# Altium PCB PCB.PcbDoc
Units mm, origin at the board's own origin, x right, y up, seen from the top; angles counter-clockwise.
Board outline 60.07 x 27.18 mm, 2 copper layers (Top Layer, Bottom Layer); 26 components, 17 nets, 70 pads, 2 vias.
Unrouted connection lines stored in the file: 1.
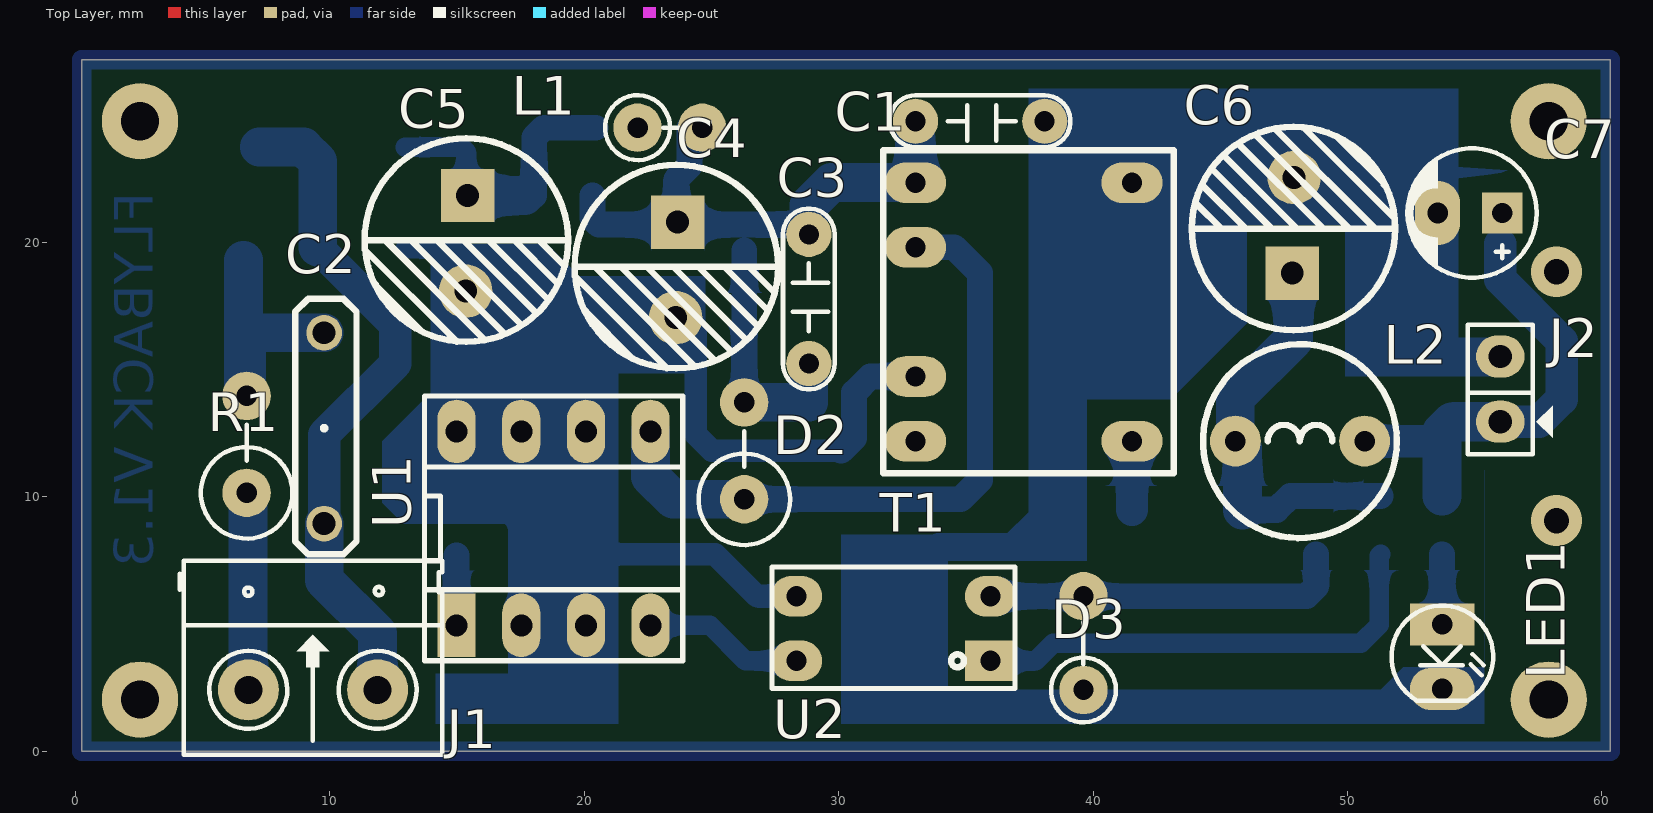
[diagram p0: Top Layer view]
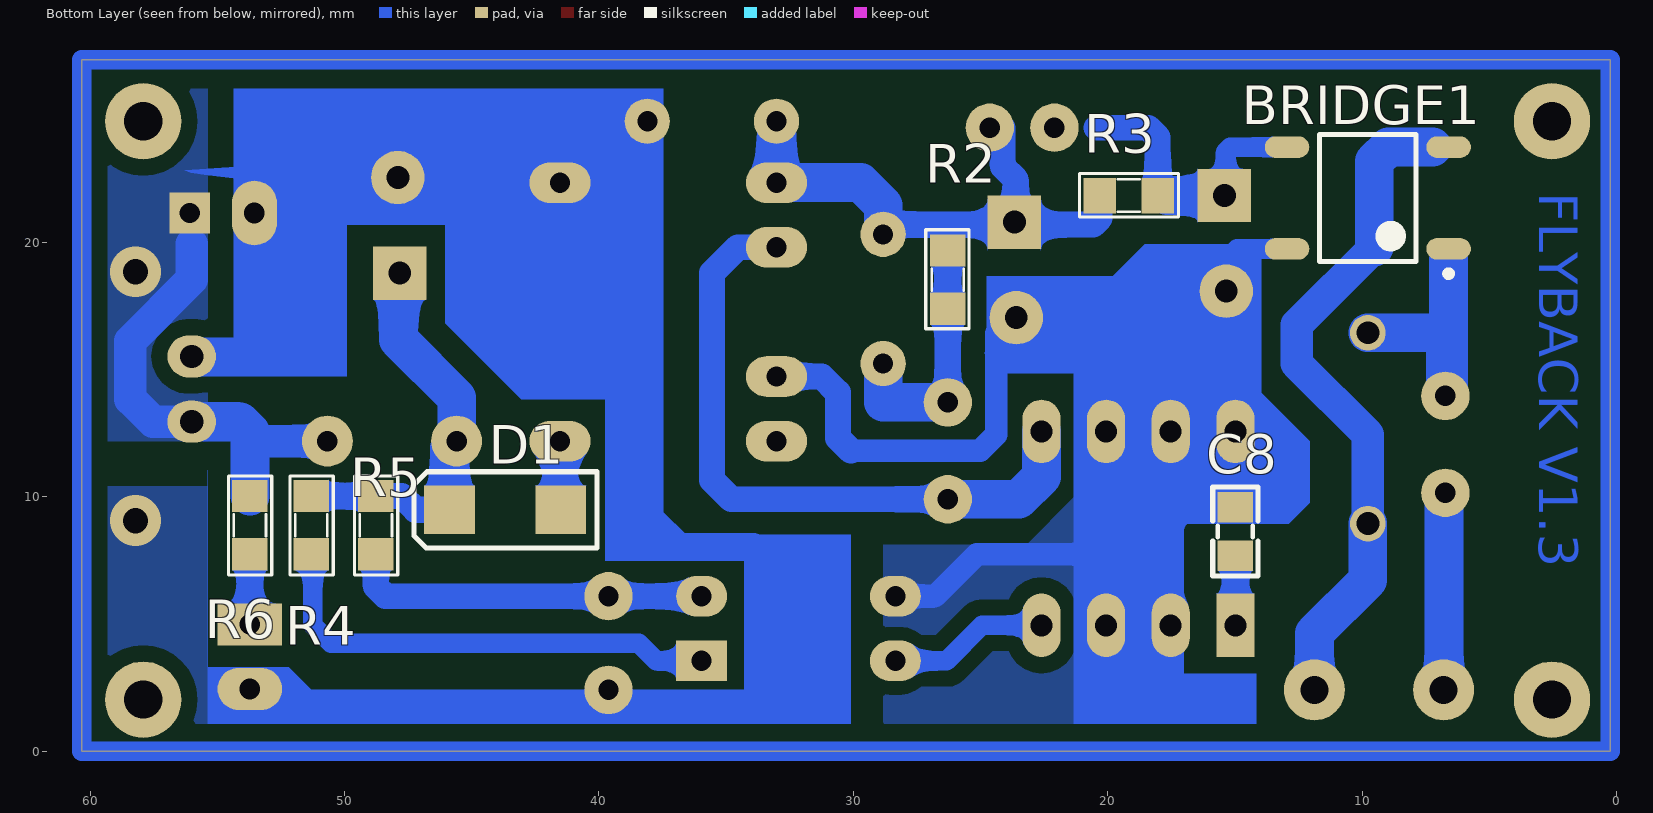
[diagram p1: Bottom Layer view, seen from below]
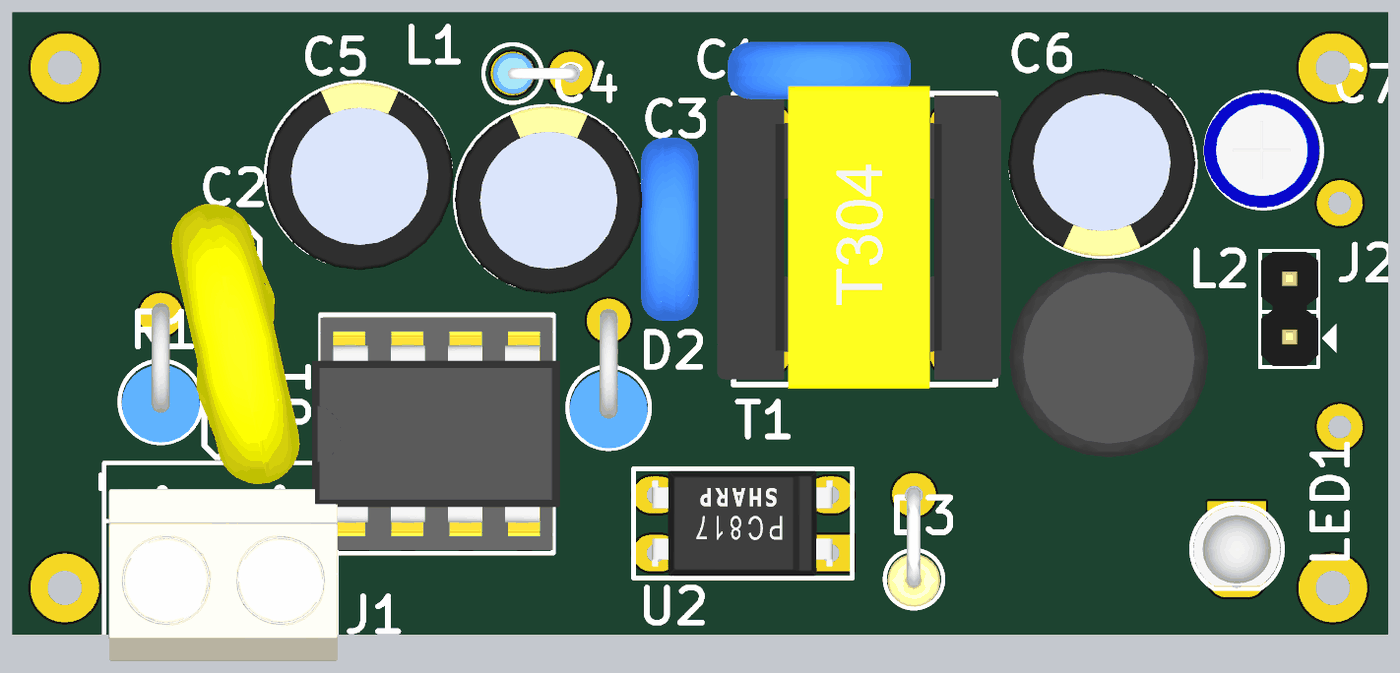
[diagram p2: 3D render of the assembled board from above, using the file's embedded part models]
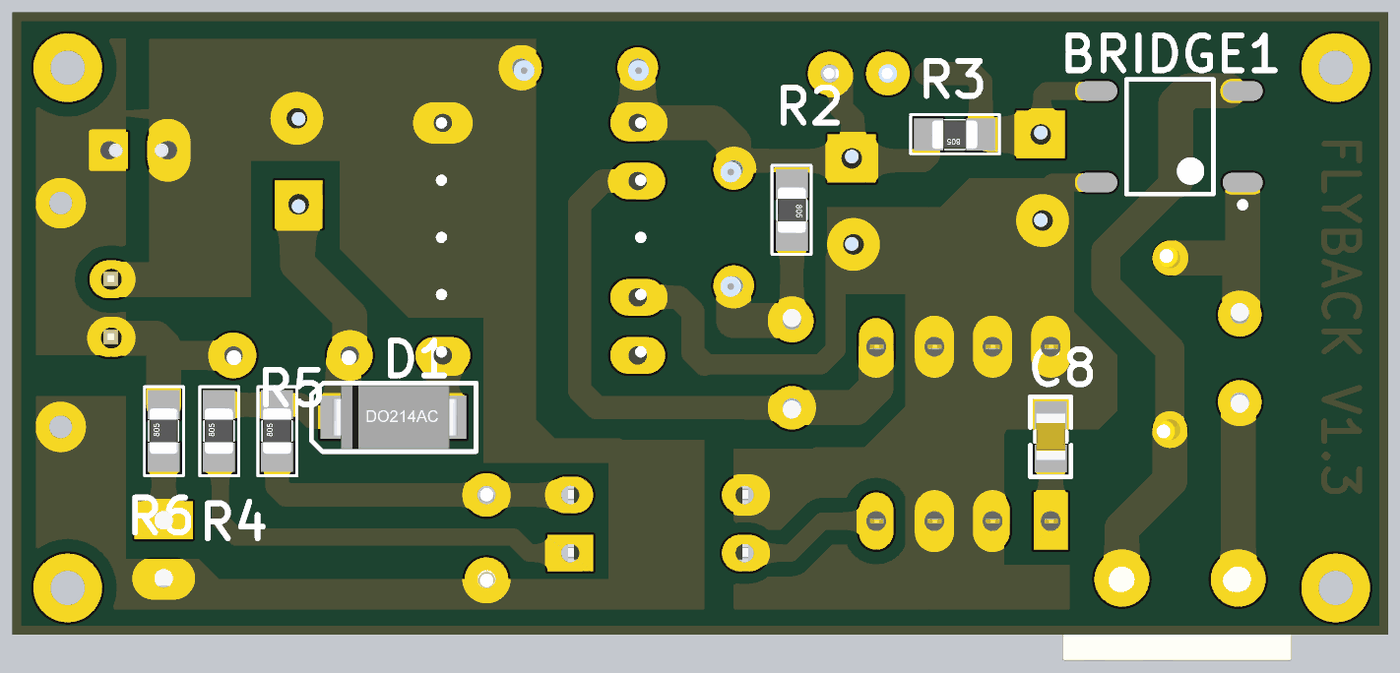
[diagram p3: 3D render of the assembled board from below, using the file's embedded part models]

## Layer stack, top to bottom
Top Solder: solder mask 0.0102, Solder Resist, Dk 3.5
Top Layer: signal copper 0.0356
Dielectric 1: dielectric 0.32, FR-4, Dk 4.8
Bottom Layer: signal copper 0.0356
Bottom Solder: solder mask 0.0102, Solder Resist, Dk 3.5

## Board outline
0.254,0 60.325,0 60.325,27.178 0.254,27.178

## Design rules (kind name [scope] priority, off if disabled: settings)
Clearance [All] p1: gap=0.508 ignorepadtopadclearanceinfootprint=FALSE except(0.635: Arc-Fill Arc-Poly Arc-Region Track-Fill Track-Poly Track-Region SMDPad-Fill SMDPad-Poly SMDPad-Region THPad-Fill THPad-Poly THPad-Region Via-Fill Via-Poly Via-Region Fill-Fill Fill-Poly Fill-Region Poly-Poly Poly-Region Region-Region)
PlaneConnect [All] p1: planeconnectstyle=Direct reliefexpansion=0.508 reliefentries=4 reliefconductorwidth=0.254 reliefairgap=0.254
PolygonConnect [All] p1: connectstyle=Direct reliefconductorwidth=0.254 reliefentries=4 polygonreliefangle="90 Angle" airgapwidth=0.254
RoutingVias [All] p1: holewidth=0.711 width=1.27 viastyle="Through Hole" minholewidth=0.711 minwidth=1.27 maxholewidth=0.711 maxwidth=1.27
SolderMaskExpansion [All] p1: expansion=0.102
Width [All] p1: maxlimit=1.524 minlimit=0.508 preferedwidth=1.016
29 further rules are at their usual default settings.

## Components (designator, comment, footprint, x,y, rotation, side; value= is the part's Value field where it differs from the comment)
BRIDGE1 "MB10S" DBS10 9.779,21.749 r0 bottom
C1 "1n 400V" CN2 38.1,24.765 r180 top
C2 "471K" MOV-14D(5.2MM-T) 9.779,12.7 r90 top
C3 "1n 400V" CN2 28.829,20.32 r270 top
C4 "4.7uF" "tu hoa 8mm" 23.622,19.05 r270 top
C5 "4.7uF" "tu hoa 8mm" 15.367,20.094 r270 top
C6 "470uF" "tu hoa 8mm" 47.879,20.546 r90 top
C7 "100uF" "TU HOA 100uF 16V" 56.083,21.158 r180 top value=100uF/35V/50V
C8 "104" "Tu 0805" 14.986,8.636 r90 bottom
D1 "SS14" "DIODE SMD" 43.688,9.59 r180 bottom
D2 "FR107" RES-1WD 26.289,11.557 r90 top value=1N4007
D3 "3.9V" RES-1/4WD 39.624,4.064 r90 top
J1 "AC" HED2 6.798,2.413 r0 top
J2 "DC" JP2 56.007,12.954 r90 top
L1 "150mH" R1/4W1 22.098,24.511 r0 top value="150 mH"
L2 "10uH 2A" "CUON CAM 100uH3A" 48.133,12.192 r0 top
LED1 "LED" LED-3 53.721,4.991 r270 top value="LED 3 ly Single Colour"
R1 "10R" RES-1WD 6.731,11.811 r90 top
R2 "100k" SM-RES-0805 26.289,19.685 r270 bottom
R3 "1k" SM-RES-0805 18.034,21.844 r0 bottom value="R1/4W - 1K"
R4 "47" SM-RES-0805 51.308,7.747 r90 bottom
R5 "470R" SM-RES-0805 48.768,7.747 r90 bottom value=470
R6 "1k" SM-RES-0805 53.721,7.747 r90 bottom
T1 "EE12.7" EE13 31.75,10.922 r0 top
U1 "TNY264" DIP8 18.745,8.763 r90 top
U2 "PC817" OPTO 35.941,3.556 r180 top value=TLP5211

## Footprints (in the part's own frame and the unit in brackets; to place one, negate y for a bottom-side part, rotate by r counter-clockwise, add the part's x,y. Pads: shape width x height; smd on the part's side, far side on the other; paste and mask are expansions set on the pad)
CN2 [mil]
  round 70 hole 31: 1(0,0) 2(200,0)
  silkscreen extent -40,-40 240,40, body extent -54,-44 260,55, height 407
"CUON CAM 100uH3A" [mm] "100uH3A"
  round 2 hole 0.8: 1(-2.54,0) 2(2.54,0)
  silkscreen extent -3.81,-3.81 3.81,3.81, body extent -4.35,-4.45 4.35,4.25, height 10.01
DBS10 [mm] "SOP, 4-Leads, Body 5.01x4.50mm, Pitch 4.00mm, IPC Medium Density"
  oval 1.75x0.85 smd: 1(-3.175,2) 2(-3.175,-2) 3(3.175,-2) 4(3.175,2)
  silkscreen extent -3.3,-2.5 1.9,3.1, body extent -2.3,-2.5 2.3,2.5, height 2.65
"DIODE SMD" [mm]
  rect 2x1.9 smd: 1(2.184,-0.102) 2(-2.184,-0.102)
  silkscreen extent -3.58,-1.6 3.61,1.4, body extent -2.67,-1.5 2.82,1.3, height 2.3
DIP8 [mm]
  rect 2.5x1.5 hole 0.864: 1(-3.81,3.759)
  oval 2.5x1.5 hole 0.864: 2(-3.81,1.219) 3(-3.81,-1.321) 4(-3.81,-3.861) 5(3.81,-3.861) 6(3.81,-1.321) 7(3.81,1.219) 8(3.81,3.759)
  silkscreen extent -5.21,-5.13 5.21,5.03, body extent -5.08,-5.4 5.08,5.4, height 8.1
EE13 [mm] "EE13"
  oval 2.4x1.6 hole 0.8: 1(1.27,11.43) 2(1.27,8.89) 4(1.27,3.81) 5(1.27,1.27) 6(9.779,1.27) 10(9.779,11.43)
  silkscreen extent 0,0 11.43,12.7, body extent -0.71,-0.18 11.69,13.04, height 11.88
HED2 [mm] "Header 2, 2 pin, hight 300mil, Pin to Pin 200, Colour Green"
  round 2.4 hole 1.1: 1(0,0) 2(5.08,0)
  silkscreen extent -2.69,-2.54 7.62,5.08, body extent -2.33,-3.56 7.67,3.94, height 10
JP2 [mil]
  oval 65x75 hole 36: 1(0,0) 2(101,0)
  silkscreen extent -50,-81 150,50, body extent -48,-50 148,48, height 323
LED-3 [mil] "LED 2 PIN, 3ly Only colour"
  rect 65x100 hole 32: 1(0,0)
  oval 65x100 hole 32: 2(100,0)
  silkscreen extent -29,-78 118,79, body extent -25,-75 113,75, height 217
MOV-14D(5.2MM-T) [mm]
  round 1.4 hole 0.9: 1(-3.75,0) 2(3.75,0)
  silkscreen extent -4.95,-1.27 5.08,1.14, body extent -6.56,-3.68 6.57,3.24, height 15.25
OPTO [mm]
  rect 2x1.6 hole 0.8: 1(-0.025,0)
  oval 2x1.6 hole 0.8: 2(-0.025,-2.54) 3(7.595,-2.54) 4(7.595,0)
  silkscreen extent -0.99,-3.68 8.56,1.09, body extent -0.13,-3.59 7.75,1, height 4.81
R1/4W1 [mm] "R 1/4W, 2 Pin, 150mil"
  round 1.905 hole 0.8: 1(0,0) 2(2.54,0)
  silkscreen extent -1.27,-1.28 1.65,1.28, body extent -0.89,-0.92 2.82,0.92, height 7.3
RES-1/4WD [mm]
  round 1.905 hole 0.8: 1(-1.651,0) 2(2.032,0)
  silkscreen extent -2.93,-1.28 1.02,1.27, body extent -2.85,-1.14 2.35,1.16, height 9.64
RES-1WD [mm]
  round 1.905 hole 0.8: 1(-1.651,0) 2(2.159,0)
  silkscreen extent -3.45,-1.8 1.02,1.8, body extent -3.43,-1.7 2.67,1.7, height 12.65
SM-RES-0805 [mil]
  rect 50x55 smd: 1(0,0) 2(90,0)
  silkscreen extent -32,-34 121,33, body extent 6,-25 84,25, height 31
"Tu 0805" [mm] "Compoment SMD 80x50mil"
  rect 1.2x1.4 smd: 1(-0.946,-0.003) 2(0.954,-0.003)
  silkscreen extent -1.75,-0.89 1.75,0.89, body extent -1.01,-0.64 1.01,0.63, height 0.61
"tu hoa 8mm" [mm]
  rect 2.1x2.1 hole 0.9: 1(-1.753,0.051)
  round 2.1 hole 0.9: 2(2.007,-0.025)
  silkscreen extent -4,-4 4,4, body extent -4.02,-4.05 4.18,4.15, height 14.4
"TU HOA 100uF 16V" [mm] "Tu hoa < 22uF/16>50V"
  rect 1.6x1.6 hole 0.8: 1(0,0)
  oval 1.778x2.54 hole 0.813: 2(2.54,0)
  silkscreen extent -1.36,-2.54 3.72,2.54, body extent -1.26,-2.53 3.8,2.53, height 7.29

## Part data
C1 C3: library part Cap2KV, LatestRevisionDate=17-Jul-2002, LatestRevisionNote="Re-released for DXP Platform.", PackageReference=RAD-0.3, Published=8-Jun-2000, Publisher="Altium Limited"
C2: library part MOV
C4 C5: library part "Tu Hoa 4.7uF 400V 8x12", "C?m", Chung_Loai=C?m, Don_Vi=Con, Ma_Hang=MH003744, So_Chan=2, Ten_Linh_Kien="T? Hóa 4.7uF 400V 8x12MM"
C6: library part "Tu Hoa 470uF 16V 8x11", "C?m", Chung_Loai=C?m, Don_Vi=Con, Ma_Hang=MH006550, So_Chan=2, Ten_Linh_Kien="T? Hóa 470uF 16V 8x11MM"
C7: library part CP3, "Cap 100uF/35V - 470uF/16V", Description 1="1000uF/6,3V - 470uF/16V - 330uF - 25V", Description 2="220uF/35V - 100uF/50V - 63V - 4,7uF/200V", Description 3="22uF => 33uF100V - 3,3uF => 4,7uF/250V", Description 4="2,2uF =>3,3uF/350 - 2,2uF/400V - 1uF/450V"
C8: library part "Tu 104", "Dán", Chung_Loai=Dán, Don_Vi=Con, Ma_Hang=MH004551, Ten_Linh_Kien="T? 0805 104-100nF 10% 50V"
D1: library part "Diode SS14 ( 1N5819)", "Dán", Chung_Loai=Dán, Don_Vi=Con, Ma_Hang=MH002211, Ten_Linh_Kien="Diode SS14 DO214 Schottky 1A 40V ( 1N5819 DO214)"
D2: library part D1A, "Diode 1A"
D3: library part "Diode Zener", "Zener Diode", LatestRevisionDate=17-Jul-2002, LatestRevisionNote="Re-released for DXP Platform.", PackageReference=DIODE-0.7, Published=8-Jun-2000, Publisher="Altium Limited"
J1: library part KF2, Manufacturer="Würth Elektronik eiSos GmbH", partNo=691103110002, ComponentLink1 Description=Manufacturer, ComponentLink1URL=http://www.we-online.com, ComponentLink2 Description=Datasheet, ComponentLink2URL=http://katalog.we-online.de/em/datasheet/6911031100xx.pdf, Created by="Karrer Zheng", Created Date="29 October 2013", NoPins=2
J2: library part JP2, "WR-PHD 2.54 mm Angled Socket Header", Manufacturer="W¨¹rth Elektronik eiSos GmbH", partNo=613002143121, ComponentLink1 Description=Manufacturer, ComponentLink1URL=http://www.we-online.com, ComponentLink2 Description=Datasheet, ComponentLink2URL=http://katalog.we-online.de/em/datasheet/6130xx143121.pdf, Created by="Karrer Zheng", Created Date="29 March 2013", NoPins=02
L1: library part L1, "Inductor"
L2: library part "CUON CAM 470uH DIP", "C?m", Chung_Loai=C?m, Don_Vi=Con, Ma_Hang=MH002232, Ten_Linh_Kien="Cu?n C?m 470uH 3A 8x10MM"
LED1: "LED Single colour Green and Red"
R1: library part "Tro Vach 1W 5% 10R", "C?m", Chung_Loai=C?m, Don_Vi=Con, Ma_Hang=MH006392, So_Chan=2, Ten_Linh_Kien="Tr? 5% 1w 10R"
R2: "Resistor SMD 0805", LatestRevisionDate=17-Jul-2002, LatestRevisionNote="Re-released for DXP Platform.", PackageReference=AXIAL-0.4, Published=8-Jun-2000, Publisher="Altium Limited"
R3: library part R1/4W, "Resistor 1/4W"
R4: library part "Tro 0805 5% 47R", "Dán", Chung_Loai=Dán, Don_Vi=Con, Ma_Hang=MH005321, So_Chan=2, Ten_Linh_Kien="Tr? 0805 5% 47R"
R5 R6: library part R0805, "Resistor SMD 0805", LatestRevisionDate=17-Jul-2002, LatestRevisionNote="Re-released for DXP Platform.", PackageReference=AXIAL-0.4, Published=8-Jun-2000, Publisher="Altium Limited"
T1: library part Tranformer
U2: library part OPTO, "Single Opto"

## Free pads (board coordinates)
  round 3 hole 1.5: 4(2.54,2.032) 4(2.54,24.765) 4(57.912,2.032) 4(57.912,24.765)

## Via types
v1: diameter 2, hole 1, Top Layer to Bottom Layer, 2 vias

## Nets (pads, with @x,y where several pads share a name; then routed paths per layer and width w, separated by ;. In a path a pad name is that pad's centre, name@x,y a point inside that pad or via, vN(x,y) a via of type N, cw(c..) or ccw(c..) an arc to the next point about the centre after c; other vN are vias at no path point)
5V: C7.1 J2.1 L2.2 R6.2 | length 18.8
  Bottom Layer w1.27: L2.2 53.34,12.192 53.721,12.573 ; R6.2@53.66,10.033 53.66,10.729 ; J2.1 57.531,12.954 58.42,13.843 58.42,16.129 56.007,18.542 56.007,19.939
  Bottom Layer w1.524: R6.2 53.721,12.573 54.102,12.954 J2.1
  other v1: 58.217,18.847
GND: BRIDGE1.4 C4.2 C5.2 C8.2 T1.4 U1.2 U1.3 U1.7 U1.8 U2.3 | length 66.1
  Bottom Layer w0.762: BRIDGE1.4 14.923,19.749 15.367,19.305 C5.2@15.367,18.344
  Bottom Layer w0.889: C8.2 15.044,9.652 17.526,9.652 ; U1.2 17.526,9.652 ; U1.7 17.526,9.652 ; 20.32,2.667 20.066,2.921 U1.3 20.066,7.747 ; C4.2@23.622,17.201 24.384,16.439 24.384,12.446 25.019,11.811 30.099,11.811 ; U2.3 26.797,6.096 25.146,7.747 20.066,7.747 ; 17.526,9.652 19.939,9.652 20.066,9.525 20.066,7.747
  Bottom Layer w1.016: C8.2 14.983,12.57 U1.8 ; C5.2@15.367,18.344 17.597,18.344 18.74,17.201 C4.2@23.622,17.201 ; 30.099,11.811 30.607,12.319 30.607,14.097 31.242,14.732 T1.4
  Bottom Layer w1.524: U1.8 14.986,16.002 15.367,16.383 C5.2@15.367,18.344
GND1: C1.1 C6.2 C7.2 D3.1 J2.2 LED1.2 T1.10 | length 71.4
  Bottom Layer w0.889: 38.608,8.128 33.909,8.128 33.147,7.366 33.147,2.896 34.265,1.778 51.562,1.778 51.816,2.032 LED1.2@53.721,2.032
  Bottom Layer w1.524: C1.1 38.735,24.13 38.735,22.352 38.989,22.098 38.989,21.336 ; 38.989,9.144 38.989,21.336 ; J2.2@56.007,15.494 53.848,15.494 53.467,15.875 53.467,19.939 53.467,22.296 47.879,22.296 47.823,22.352 T1.10 40.005,22.352 38.989,21.336
  other v1: 58.217,9.068
L: BRIDGE1.1 C2.2 R1.2 | length 10.9
  Bottom Layer w1.524: 6.604,19.304 6.604,14.097 R1.2 6.731,16.383 6.798,16.45 C2.2
N: BRIDGE1.2 C2.1 J1.2 | length 26.8
  Bottom Layer w1.27: 9.525,19.812 12.573,16.764 12.573,15.24 9.779,12.446 C2.1 ; J1.2@11.684,2.413 J1.2
  Bottom Layer w1.524: BRIDGE1.2@7.239,23.749 8.961,23.749 9.525,23.185 9.525,19.812 ; C2.1 9.779,6.731 11.878,4.632 J1.2
NetBRIDGE1_3: BRIDGE1.3 C5.1 L1.1 R3.1 | length 11.4
  Bottom Layer w0.762: BRIDGE1.3 15.184,23.749 15.367,23.566 C5.1@15.367,21.844
  Bottom Layer w1.016: R3.1 18.034,24.13 18.415,24.511 20.447,24.511
  Bottom Layer w1.524: C5.1@15.367,21.844 R3.1@17.653,21.844
NetC1_2: C1.2 C3.1 C4.1 L1.2 R2.1 R3.2 T1.1 | length 21.3
  Bottom Layer w1.016: R3.2 20.32,20.955 20.574,20.701 C4.1@23.622,20.701 ; L1.2@24.13,24.511 24.13,22.987 23.622,22.479 C4.1@23.622,20.701 ; C3.1@28.829,20.701 26.289,20.701 C4.1@23.622,20.701
  Bottom Layer w1.524: C3.1@28.829,20.701 28.829,21.463 29.718,22.352 T1.1 C1.2
NetC3_2: C3.2 D2.2 R2.2 | length 9.9
  Bottom Layer w1.016: D2.2 R2.2 26.289,19.685
  Bottom Layer w1.524: D2.2 28.829,13.716 C3.2@28.829,15.113
NetC6_1: C6.1 D1.2 L2.1 R4.2 R5.2 | length 16
  Bottom Layer w1.016: D1.2 47.208,9.489 47.752,10.033 R5.2 R4.2
  Bottom Layer w1.524: D1.2 45.872,11.913 L2.1 45.593,13.899 47.879,16.185 C6.1@47.879,18.796
NetC8_1: C8.1 U1.1 | length 2.7
  Bottom Layer w1.016: C8.1 14.983,4.956 U1.1
NetD1_1: D1.1 T1.6 | length 2.7
  Bottom Layer w1.27: D1.1@41.529,9.489 T1.6
NetD2_1: D2.1 T1.2 U1.5 | length 26.5
  Bottom Layer w1.016: D2.1 34.798,9.906 35.56,10.668 35.56,18.796 34.544,19.812 T1.2
  Bottom Layer w1.524: U1.5 22.606,10.795 23.495,9.906 D2.1
NetD3_2: D3.2 R5.1 U2.2 | length 14.2
  Bottom Layer w1.016: U2.2 D3.2 48.387,6.096 48.768,6.477 R5.1
NetJ1_1: J1.1 R1.1 | length 7.8
  Bottom Layer w1.524: R1.1 6.787,10.104 J1.1@6.787,2.413
NetLED1_1: LED1.1 R6.1 | length 2.8
  Bottom Layer w1.016: LED1.1 R6.1
NetR4_1: R4.1 U2.1 | length 18.7
  Bottom Layer w0.762: U2.1 37.744,3.556 38.443,4.255 50.533,4.255 51.247,4.968 51.247,7.686 R4.1
NetU1_4: U1.4 U2.4 | length 6.3
  Bottom Layer w0.762: U1.4 24.943,4.953 26.34,3.556 U2.4
pads on no net: T1.5 U1.6
copper on no net: | length 174.4
  Bottom Layer w0.762: 60.254,0 0.254,0 0.254,27.178 60.254,27.178 ; 60.325,0 60.325,27.178

## Polygon pours and split planes (outlines as drawn)
5V on Bottom Layer "5V" (solid, remove dead copper, pour order 6): 55.372,12.192 59.3,12.192 59.3,26.047 55.372,26.047
GND1 on Bottom Layer "GND1" (solid, remove dead copper, pour order 4): 55.372,1.092 59.69,1.092 59.69,10.414 55.372,10.414
GND on Bottom Layer "GND" (solid, remove dead copper, pour order 2): 21.209,10.104 23.185,8.128 28.829,8.128 28.829,1.143 28.778,1.092 21.209,1.092 21.209,10.439

## Other copper
Bottom Layer:
  region net GND: 21.336,9.5 21.336,15.24 17.907,15.24 17.907,9.108 18.299,9.5
  region net GND: 17.323,25.07
  region: 17.498,2.972
  region: 14.326,10.439
  region: 16.256,0
  region net GND1: 37.465,9.398 36.576,8.509 30.099,8.509 30.099,1.092 55.372,1.092 55.372,11.049 55.372,3.302 52.197,3.302 51.308,2.413 34.29,2.413 34.29,7.493 39.751,7.493 39.751,26.035 37.465,26.035
  region net GND1: 39.37,13.843 43.053,13.843 46.044,16.834 46.044,20.701 49.911,20.701 49.911,14.732 55.626,14.732 55.88,14.986 55.88,16.129 54.356,16.129 54.356,26.035 39.37,26.035
  region net GND: 21.336,10.287 18.288,10.287 18.288,14.732 18.288,14.859 19.431,14.859 24.765,14.859 24.765,18.669 19.812,18.669 18.542,19.939 14.16,19.939 13.97,19.749 13.97,14.097 12.065,12.192 12.065,9.779 12.894,8.95 17.018,8.95 17.018,3.048 14.16,3.048 14.16,1.092 21.336,1.092
  text "FLYBACK V1.3" at 3.048,21.971 h1.52 r90